# EAGLE board with_boost (EAGLE 6.4)
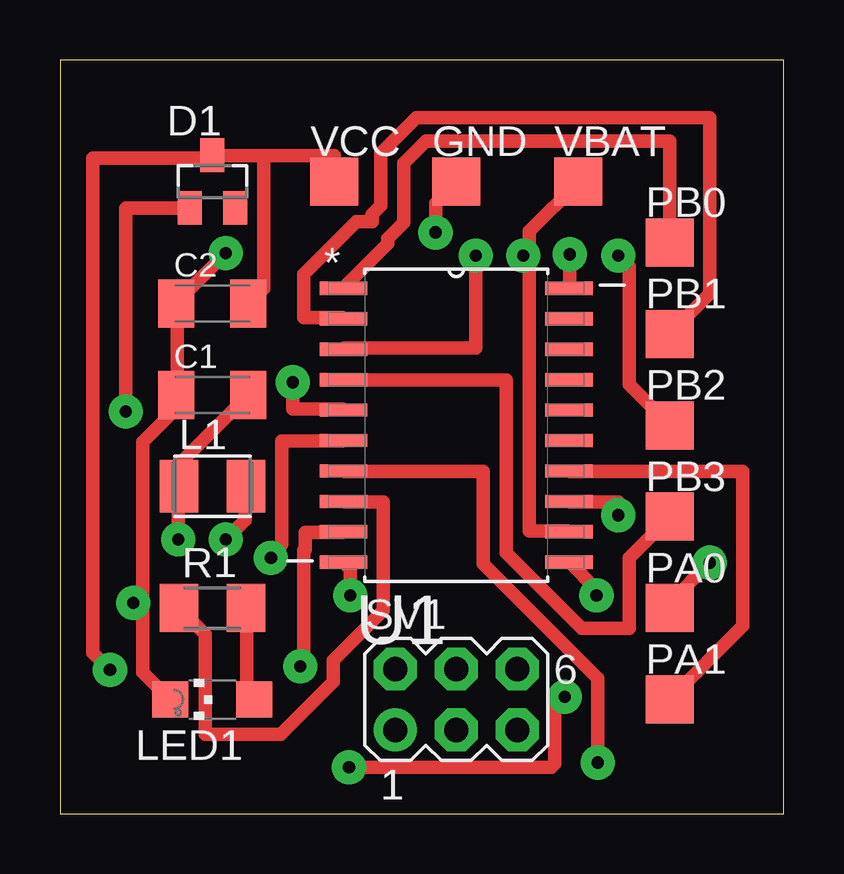
[diagram p0: board, top side]
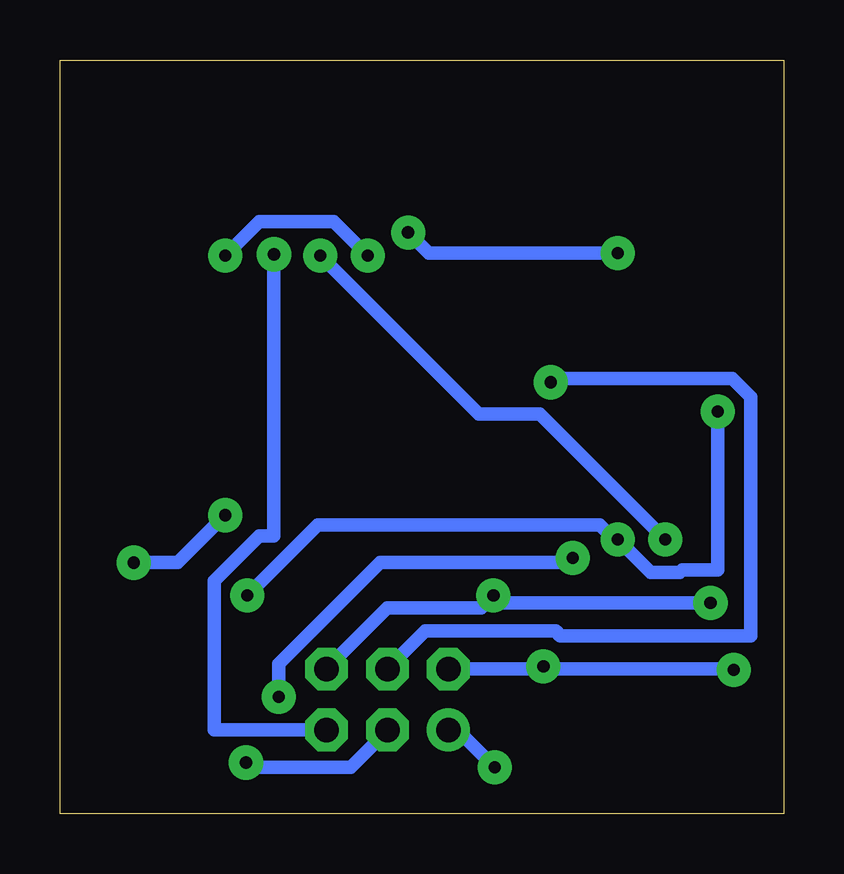
[diagram p1: board, bottom side, seen from below]

Size 30.15 x 31.42 mm. Coordinates in mm from the lower left corner, seen from the top.
Outline: 0,0 30.15,0 30.15,31.42 0,31.42 0,0
Copper layers (1*16): Top 0.035mm / dielectric 1.5mm / Bottom 0.035mm
Design rules "default *": minimum track width 22mil, minimum drill 20mil, track to track 15mil, track to pad 15mil, pad to pad 15mil, via to via 15mil, smd to smd 15mil, copper to edge 40mil, drill to drill 8mil, minimum pad ring 15mil, minimum via ring 18mil, stop-mask expansion 4mil, vias tented up to drill 0mil, thermal gap 10mil
tRestrict: area 12.7,2.2 to 20.3,7.3
vRestrict: area 12.7,9.8 to 20.3,22.5

## Footprints (pad centres in the part's own frame; a part is rotated, then mirrored left to right if it is on the bottom)
C1206K = smd 1.5 x 2: 1 -1.5,0; 2 1.5,0
SOT23 = smd 1 x 1.4: 1 -0.95,-1.1; 2 0.95,-1.1; 3 0,1.1
TP20SQ = smd 2 x 2: TP 0,0
L3225M = smd 1.6 x 2.2: 1 -1.4,0; 2 1.4,0
CHIPLED_1206 = smd 1.5 x 1.5: A 0,-1.75; C 0,1.75
M1206 = smd 1.6 x 2: 1 -1.4,0; 2 1.4,0
MA03-2 = drill 1.016: 1 -2.54,-1.27 | drill 1.016 octagon: 2 -2.54,1.27; 3 0,-1.27; 4 0,1.27; 5 2.54,-1.27; 6 2.54,1.27
SOIC127P1032X265-20N = smd 1.981 x 0.559: 1 -4.699,5.715; 2 -4.699,4.445; 3 -4.699,3.175; 4 -4.699,1.905; 5 -4.699,0.635; 6 -4.699,-0.635; 7 -4.699,-1.905; 8 -4.699,-3.175; 9 -4.699,-4.445; 10 -4.699,-5.715; 11 4.699,-5.715; 12 4.699,-4.445; 13 4.699,-3.175; 14 4.699,-1.905; 15 4.699,-0.635; 16 4.699,0.635; 17 4.699,1.905; 18 4.699,3.175; 19 4.699,4.445; 20 4.699,5.715

## Placement (x,y rotation side)
C1  4.7uf  [C1206K]  6.35,17.46 0 top
C2  10uf ceramic  [C1206K]  6.35,21.27 0 top
D1  BAS40  [SOT23]  6.35,26.35 0 top
GND  TPSQTP20SQ  [TP20SQ]  16.51,26.35 0 top
L1  10uh  [L3225M]  6.35,13.65 0 top
LED1  [CHIPLED_1206]  6.35,4.76 90 top
PA0  TPSQTP20SQ  [TP20SQ]  25.4,8.57 0 top
PA1  TPSQTP20SQ  [TP20SQ]  25.4,4.76 0 top
PB0  TPSQTP20SQ  [TP20SQ]  25.4,23.81 0 top
PB1  TPSQTP20SQ  [TP20SQ]  25.4,20 0 top
PB2  TPSQTP20SQ  [TP20SQ]  25.4,16.19 0 top
PB3  TPSQTP20SQ  [TP20SQ]  25.4,12.38 0 top
R1  330  [M1206]  6.35,8.57 0 top
SV1  [MA03-2]  16.51,4.76 0 top
U1  ATTINY43U  [SOIC127P1032X265-20N]  16.51,16.19 0 top
VBAT  TPSQTP20SQ  [TP20SQ]  21.59,26.35 0 top
VCC  TPSQTP20SQ  [TP20SQ]  11.43,26.35 0 top

## Library data of the parts
C1 C2 LED1 R1 = adafruit
D1 = diode
GND PA0 PA1 PB0 PB1-PB3 VBAT VCC = testpad
L1 = resistor
SV1 = con-lstb; OC_FARNELL: unknown; OC_NEWARK: unknown
U1 = Atmel_By_element14_Batch_1; MPN: ATTINY43U-SU; OC_FARNELL: 1841623; OC_NEWARK: 12T1338; PACKAGE: SOIC-20; SUPPLIER: Atmel

## Nets
GND: C1.1 C2.1 GND.TP LED1.C SV1.6 U1.10
N$1: LED1.A R1.2
N$2: D1.1 L1.2 U1.11
N$3: R1.1 U1.8
PA0: PA0.TP U1.13
PA1: PA1.TP U1.14
PA7: SV1.5 U1.20
PB0: PB0.TP U1.1
PB1: PB1.TP U1.2
PB2: PB2.TP U1.3
PB3: PB3.TP U1.4
PB4: SV1.4 U1.5
PB5: SV1.1 U1.6
PB6: SV1.3 U1.7
VBAT: C1.2 L1.1 U1.12 VBAT.TP
VCC: C2.2 D1.3 SV1.2 U1.9 VCC.TP

## Tracks (layer width: path | path; a pad name or v marks a point on that pad's centre or on a via)
GND  (via drill 0.51)
  Top 0.559: v12.09,9.09 12.09,10.21 11.84,10.46 U1.10 | 3.45,8.79 3.45,15.49 4.83,16.87 4.83,17.42 C1.1 4.88,17.73 4.88,21.23 C2.1 5.03,21.49 v6.91,23.37 | 3.45,8.79 3.45,5.89 4.57,4.78 LED1.C | v15.65,24.23 15.65,25.45 16.51,26.31 GND.TP | v3.05,8.79 3.45,8.79
  Bottom 0.559: SV1.6 19.05,6.04 16.51,8.59 12.6,8.59 v12.09,9.09 11.84,8.99 11.63,8.79 v3.05,8.79 | v15.65,24.23 14.78,23.37 v6.91,23.37
N$1
  Top 0.559: LED1.A 8.08,4.78 7.77,5.08 7.77,8.53 R1.2
N$2  (via drill 0.51)
  Top 0.559: v2.74,16.76 2.74,25.25 5.38,25.25 D1.1 | v6.91,11.43 7.72,12.24 7.72,13.61 L1.2 | v22.35,9.09 22.35,9.35 21.23,10.46 U1.11
  Bottom 0.559: v2.74,16.76 2.74,10.16 4.22,10.16 4.32,10.06 5.54,10.06 v6.91,11.43 7.16,11.53 7.67,12.04 19.41,12.04 v22.35,9.09
N$3
  Top 0.559: U1.8 11.84,13.01 13.46,13.01 13.46,8.48 11.38,6.4 11.38,5.49 9.2,3.3 6.04,3.3 6.04,7.47 4.98,8.53 R1.1
PA0  (via drill 0.51)
  Top 0.559: v23.27,12.45 23.27,13.01 21.23,13.01 U1.13 | v27.08,10.46 25.4,8.79 PA0.TP
  Bottom 0.559: v23.27,12.45 25.25,10.46 v27.08,10.46
PA1
  Top 0.559: U1.14 21.23,14.28 28.45,14.28 28.45,7.82 25.4,4.78 PA1.TP
PA7  (via drill 0.51)
  Top 0.559: v21.23,23.32 21.23,21.95 U1.20
  Bottom 0.559: v21.23,23.32 21.23,11.58 21.84,11.58 23.72,9.7 23.72,3.5 19.05,3.5 SV1.5
PB0
  Top 0.559: PB0.TP 25.4,28.04 15.24,28.04 14.33,27.13 14.33,24.64 13.66,23.98 13.66,23.77 11.84,21.95 U1.1
PB1
  Top 0.559: U1.2 11.79,20.68 10.16,20.68 10.16,22.5 12.34,24.69 13.01,24.69 13.01,24.99 13.36,25.35 13.36,27.53 14.83,29.01 27.08,29.01 27.08,21.69 25.4,20.02 PB1.TP
PB2  (via drill 0.51)
  Top 0.559: v17.32,23.27 17.32,19.41 11.84,19.41 U1.3 | v23.27,23.27 23.72,22.81 23.72,17.88 25.4,16.2 PB2.TP
  Bottom 0.559: v17.32,23.27 18.75,24.69 21.84,24.69 v23.27,23.27
PB3
  Top 0.559: U1.4 11.84,18.09 18.59,18.09 18.59,10.87 21.74,7.72 23.72,7.72 23.72,10.67 25.4,12.34 PB3.TP
PB4  (via drill 0.51)
  Top 0.559: v9.7,17.98 9.7,16.87 11.79,16.87 U1.5
  Bottom 0.559: v9.7,17.98 9.55,18.14 2.13,18.14 1.37,17.37 1.37,7.42 9.3,7.42 9.5,7.62 14.94,7.62 16.51,6.04 SV1.4
PB5  (via drill 0.51)
  Top 0.559: v8.79,10.67 8.79,10.77 9.25,11.23 9.25,15.54 11.79,15.54 U1.6 | v21.03,4.88 20.62,4.47 20.62,2.08 20.47,1.93 v12.04,1.93
  Bottom 0.559: v8.79,10.67 8.99,10.46 16.82,10.46 21.03,6.25 v21.03,4.88 | v12.04,1.93 13.56,3.45 13.97,3.45 SV1.1
PB6  (via drill 0.51)
  Top 0.559: v22.4,2.13 22.4,5.64 17.63,10.41 17.63,14.28 11.84,14.28 U1.7
  Bottom 0.559: v22.4,2.13 22.2,1.93 18.03,1.93 16.51,3.45 SV1.3
VBAT  (via drill 0.51)
  Top 0.559: C1.2 7.82,17.42 4.98,14.58 4.98,13.66 L1.1 4.98,13.36 4.93,13.31 v4.93,11.43 | 19.56,23.27 19.56,24.28 21.59,26.31 VBAT.TP | 19.56,23.27 19.56,11.79 21.18,11.79 U1.12 | v19.3,23.27 19.56,23.27
  Bottom 0.559: v4.93,11.43 10.16,16.66 12.7,16.66 v19.3,23.27
VCC  (via drill 0.51)
  Top 0.559: 8.48,27.43 11.43,27.43 VCC.TP | 8.48,27.43 6.35,27.43 D1.3 6.1,27.33 1.37,27.33 1.37,6.71 v2.08,5.99 | 8.48,27.43 8.48,21.89 7.87,21.29 C2.2 | v10.01,6.15 10.16,6.3 10.16,10.97 10.21,11.02 10.21,11.73 11.79,11.73 U1.9
  Bottom 0.559: SV1.2 13.97,6.04 10.11,6.04 v10.01,6.15 9.75,6.04 2.13,6.04 v2.08,5.99